# Altium PCB PCB1.PcbDoc
Units mil, origin at the board's own origin, x right, y up, seen from the top; angles counter-clockwise.
Board outline 6000 x 4000 mil, 2 copper layers (Top Layer, Bottom Layer); 1 components, 0 nets, 7 pads, 0 vias.
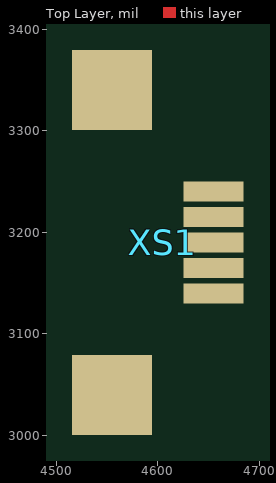
[diagram p0: Top Layer view]
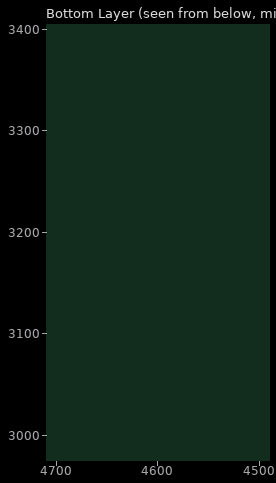
[diagram p1: Bottom Layer view, seen from below]

## Layer stack, top to bottom
Top Solder: solder mask 0.4, Solder Resist, Dk 3.5
Top Layer: signal copper 1.4
Dielectric 1: dielectric 12.6, FR-4, Dk 4.8
Bottom Layer: signal copper 1.4
Bottom Solder: solder mask 0.4, Solder Resist, Dk 3.5

## Board outline
1000,1000 7000,1000 7000,5000 1000,5000

## Design rules (kind name [scope] priority, off if disabled: settings)
Clearance [All] p1: gap=10 ignorepadtopadclearanceinfootprint=FALSE except(0: Arc-Hole Track-Hole SMDPad-Hole THPad-Hole Via-Hole Fill-Hole Poly-Hole Region-Hole Text-Hole)
PolygonConnect [All] p1: connectstyle=Relief reliefconductorwidth=10 reliefentries=4 polygonreliefangle="90 Angle" airgapwidth=10
RoomDefinition CIN1 [InComponentClass('CIN1')] p1: confinementstyle=ConfineIn formatcopy=TRUE lockcomponents=FALSE outline 6030,1830 6290,1830 6290,2330 6030,2330
RoutingVias [All] p1: holewidth=28 width=50 viastyle="Through Hole" minholewidth=28 minwidth=50 maxholewidth=28 maxwidth=50
SolderMaskExpansion [All] p1: expansion=4 istentingtop=FALSE
Width [All] p1: maxlimit=10 minlimit=10 preferedwidth=10
30 further rules are at their usual default settings.

## Classes and differential pairs
channel class Sheet2: CIN1 CIN2 CIN3 CIN4 CIN5 CIN6 CIN7 CIN8 CIN9 CIN10 CIN11 CIN12 CIN13 CIN14 CIN15 CIN16 CIN17 CIN18 CIN19 CIN20 CIN21 CIN22 CIN23 CIN24 CIN25 CIN26 CIN27 CIN28 CIN29 CIN30 CIN31 CIN32

## Components (designator, comment, footprint, x,y, rotation, side; value= is the part's Value field where it differs from the comment)
XS1 "USB Micro AB" "USB Micro AB" 4755,3190 r90 top

## Footprints (in the part's own frame and the unit in brackets; to place one, negate y for a bottom-side part, rotate by r counter-clockwise, add the part's x,y. Pads: shape width x height; smd on the part's side, far side on the other; paste and mask are expansions set on the pad)
"USB Micro AB" [mm]
  rect 0.5x1.5 smd: 1(1.27,2.54) 2(0.635,2.54) 3(0,2.54) 4(-0.635,2.54) 5(-1.27,2.54)
  rect 2x2 smd: 6(-3.81,5.08) 7(3.81,5.08)
  body extent -4.4,2.3 4.4,7.93, height 2.79

## Part data
XS1: HelpURL=https://www.hirose.co.jp/cataloge_hp/ed_ZX_20140804.pdf, Part Number="USB Micro AB"

## Nets (pads, with @x,y where several pads share a name; then routed paths per layer and width w, separated by ;. In a path a pad name is that pad's centre, name@x,y a point inside that pad or via, vN(x,y) a via of type N, cw(c..) or ccw(c..) an arc to the next point about the centre after c; other vN are vias at no path point)
pads on no net: XS1.1 XS1.2 XS1.3 XS1.4 XS1.5 XS1.6 XS1.7